# Altium PCB TG21_mach_nut_nhan _V1_ReV.PcbDoc (part 3 of 5)
Units mm, origin at the board's own origin, x right, y up, seen from the top; angles counter-clockwise.
Board outline 300 x 245 mm, 2 copper layers (Top Layer, Bottom Layer), stack 1.671 mm thick; 534 components, 407 nets, 1677 pads, 2608 vias.
Unrouted connection lines stored in the file: 3.
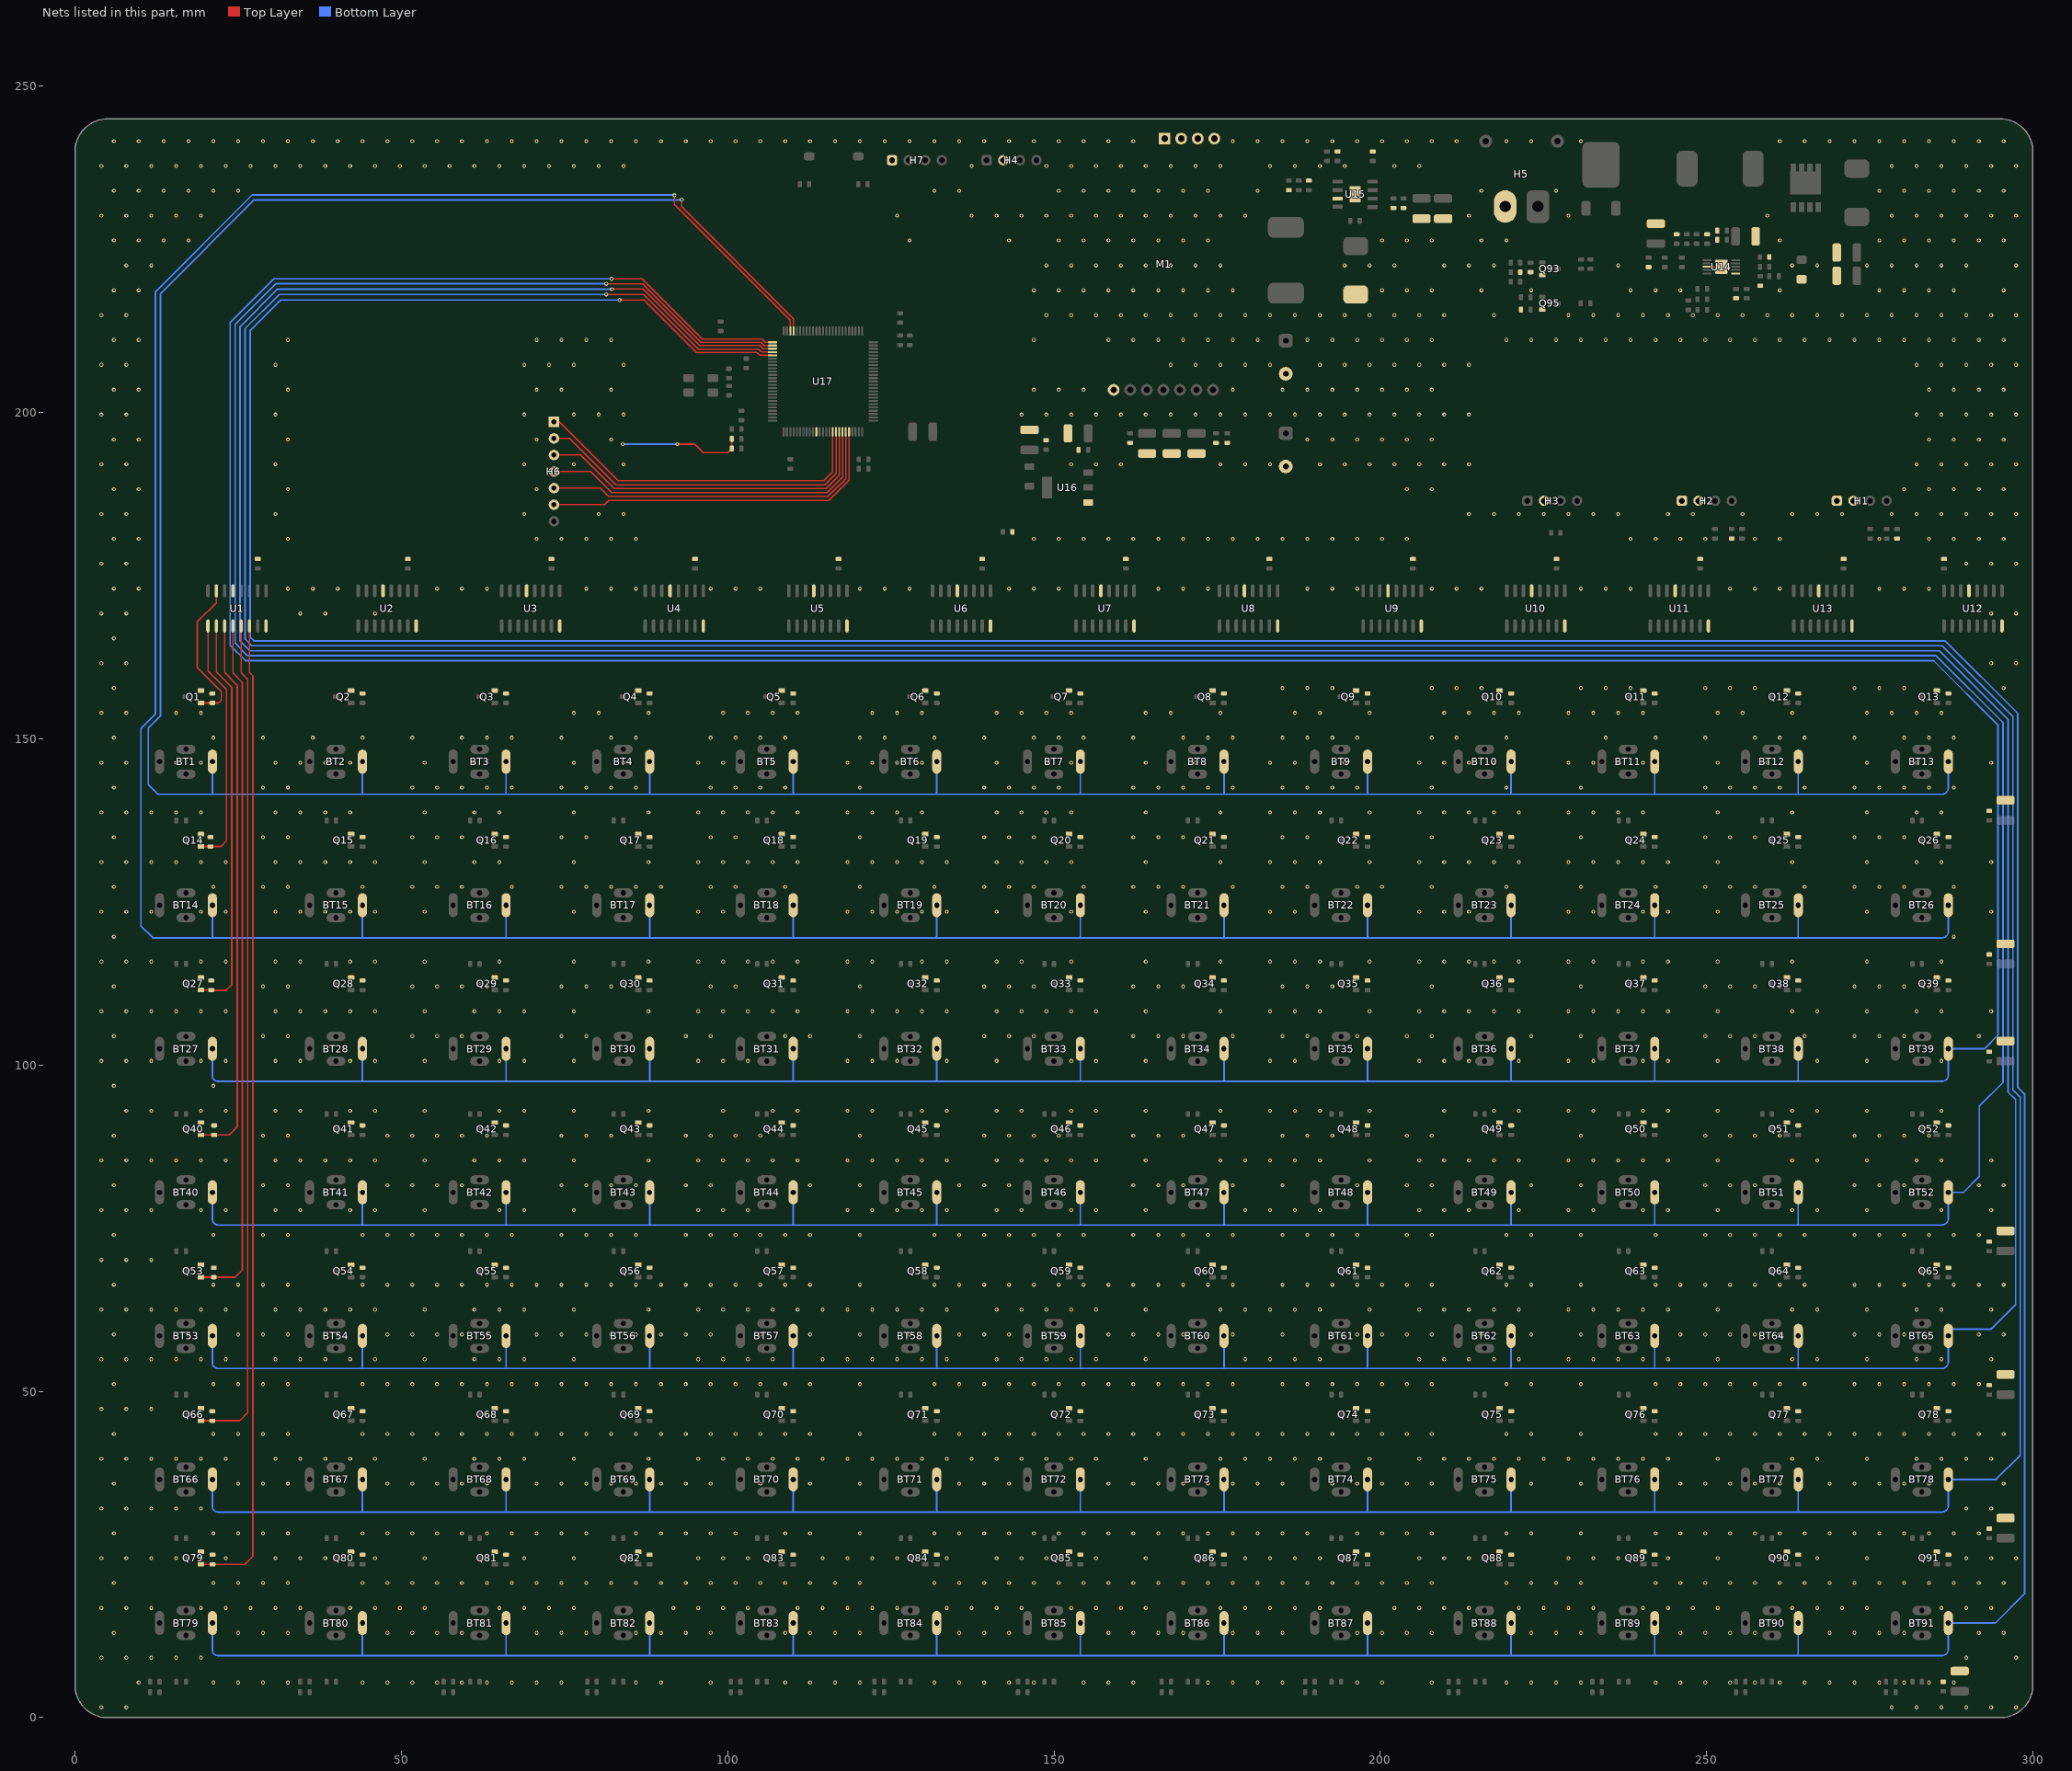
[diagram p3: the nets of this part, all layers, seen from the top]

## Via types
v1: diameter 0.6, hole 0.3, Top Layer to Bottom Layer, tented both sides, 2488 vias
v2: diameter 1.27, hole 0.711, Top Layer to Bottom Layer, tented both sides, 97 vias
v3: diameter 0.7, hole 0.3, Top Layer to Bottom Layer, tented both sides, 23 vias

## Nets (pads, with @x,y where several pads share a name; then routed paths per layer and width w, separated by ;. In a path a pad name is that pad's centre, name@x,y a point inside that pad or via, vN(x,y) a via of type N, cw(c..) or ccw(c..) an arc to the next point about the centre after c; other vN are vias at no path point) (continued)
GND: C1.1 C2.1 C3.1 C4.1 C5.1 C6.1 C7.1 C8.1 C9.1 C10.1 C11.1 C12.1 C13.1 C27.1 C28.1 C29.1 C30.1 C31.1 C32.1 C33.1 C34.1 C35.1 C36.1 C37.1 C38.1 C39.1 C40.1 C41.2 C42.2 C43.2 C44.1 C45.1 C48.1 C49.1 C50.2 C51.1 C52.1 C53.2 C54.1 C58.1 C59.1 C60.2 C62.1 C63.2 C64.2 C65.1 C66.1 C67.1 C68.2 C69.1 C70.1 C71.2 C72.1 C73.2 C74.1 C75.1 C76.2 C77.2 D2.1 H1.1 H1.2 H2.1 H2.2 H3.2 H4.2 H5.2 H7.1 M1.0 M1.7 Q1.2 Q2.2 Q3.2 Q4.2 Q5.2 Q6.2 Q7.2 Q8.2 Q9.2 Q10.2 Q11.2 Q12.2 Q13.2 Q14.2 Q15.2 Q16.2 Q17.2 Q18.2 Q19.2 Q20.2 Q21.2 Q22.2 Q23.2 Q24.2 Q25.2 Q26.2 Q27.2 Q28.2 Q29.2 Q30.2 Q31.2 Q32.2 Q33.2 Q34.2 Q35.2 Q36.2 Q37.2 Q38.2 Q39.2 Q40.2 Q41.2 Q42.2 Q43.2 Q44.2 Q45.2 Q46.2 Q47.2 Q48.2 Q49.2 Q50.2 Q51.2 Q52.2 Q53.2 Q54.2 Q55.2 Q56.2 Q57.2 Q58.2 Q59.2 Q60.2 Q61.2 Q62.2 Q63.2 Q64.2 Q65.2 Q66.2 Q67.2 Q68.2 Q69.2 Q70.2 Q71.2 Q72.2 Q73.2 Q74.2 Q75.2 Q76.2 Q77.2 Q78.2 Q79.2 Q80.2 Q81.2 Q82.2 Q83.2 Q84.2 Q85.2 Q86.2 Q87.2 Q88.2 Q89.2 Q90.2 Q91.2 Q93.2 Q95.2 R14.1 R15.1 R16.1 R17.1 R18.1 R19.1 R20.1 R21.1 R22.1 R23.1 R24.1 R25.1 R26.1 R40.1 R41.1 R42.1 R43.1 R44.1 R45.1 R46.1 R47.1 R48.1 R49.1 R50.1 R51.1 R52.1 R66.1 R67.1 R68.1 R69.1 R70.1 R71.1 R72.1 R73.1 R74.1 R75.1 R76.1 R77.1 R78.1 R92.1 R93.1 R94.1 R95.1 R96.1 R97.1 R98.1 R99.1 R100.1 R101.1 R102.1 R103.1 R104.1 R118.1 R119.1 R120.1 R121.1 R122.1 R123.1 R124.1 R125.1 R126.1 R127.1 R128.1 R129.1 R130.1 R144.1 R145.1 R146.1 R147.1 R148.1 R149.1 R150.1 R151.1 R152.1 R153.1 R154.1 R155.1 R156.1 R170.1 R171.1 R172.1 R173.1 R174.1 R175.1 R176.1 R177.1 R178.1 R179.1 R180.1 R181.1 R182.1 R205.1 R208.1 R211.1 R212.1 R213.2 R217.1 R218.1 R222.1 R225.1 RSNS1.1 U1.8 U1.13 U2.8 U2.13 U3.8 U3.13 U4.8 U4.13 U5.8 U5.13 U6.8 U6.13 U7.8 U7.13 U8.8 U8.13 U9.8 U9.13 U10.8 U10.13 U11.8 U11.13 U12.8 U12.13 U13.8 U13.13 U14.3 U14.6 U14.11 U15.0 U15.7 U16.1 | length 21.2
  Top Layer w0.178: U14.3@250.083,222.337 U14.11@252.267,222.337
  Top Layer w0.254: v1(92.304,195.174) 94.963,195.174 96.271,193.866 100.025,193.866 100.346,194.187 100.452,194.187 100.647,194.382 R213.2@100.647,194.488 C77.2@100.647,195.961
  Bottom Layer w0.254: v1(83.947,195.174) v1(92.304,195.174)
  other v1: 4.054,1.571 7.864,1.571 278.374,1.571 282.184,1.571 285.994,1.571 289.804,1.571 293.614,1.571 297.424,1.571 9.769,5.381 21.199,5.381 25.009,5.381 28.819,5.381 32.629,5.381 44.059,5.381 47.869,5.381 51.679,5.381 55.489,5.381 59.299,5.381 63.109,5.381 66.919,5.381 70.729,5.381 74.539,5.381 85.969,5.381 89.779,5.381 97.399,5.381 108.829,5.381 112.639,5.381 116.449,5.381 120.259,5.381 131.689,5.381 135.499,5.381 139.309,5.381 143.119,5.381 146.929,5.381 154.549,5.381 158.359,5.381 162.169,5.381 173.599,5.381 177.409,5.381 181.219,5.381 185.029,5.381 196.459,5.381 200.269,5.381 207.889,5.381 219.319,5.381 223.129,5.381 226.939,5.381 230.749,5.381 242.179,5.381 245.989,5.381 249.799,5.381 253.609,5.381 257.419,5.381 261.229,5.381 265.039,5.381 268.849,5.381 272.659,5.381 276.469,5.381 280.279,5.381 284.089,5.381 287.899,5.381 4.054,9.191 7.864,9.191 11.674,9.191 15.484,9.191 19.294,9.191 289.804,9.191 297.424,9.191 5.959,13.001 25.009,13.001 28.819,13.001 32.629,13.001 47.869,13.001 51.679,13.001 55.489,13.001 59.299,13.001 70.729,13.001 74.539,13.001 78.349,13.001 85.969,13.001 89.779,13.001 93.589,13.001 97.399,13.001 108.829,13.001 112.639,13.001 116.449,13.001 120.259,13.001 135.499,13.001 139.309,13.001 143.119,13.001 158.359,13.001 162.169,13.001 165.979,13.001 169.789,13.001 177.409,13.001 181.219,13.001 185.029,13.001 196.459,13.001 200.269,13.001 204.079,13.001 207.889,13.001 223.129,13.001 226.939,13.001 230.749,13.001 245.989,13.001 249.799,13.001 253.609,13.001 257.419,13.001 268.849,13.001 272.659,13.001 276.469,13.001 280.279,13.001 291.709,13.001 295.519,13.001 4.054,16.811 7.864,16.811 11.674,16.811 19.294,16.811 23.104,16.811 26.914,16.811 30.724,16.811 34.534,16.811 42.154,16.811 45.964,16.811 49.774,16.811 53.584,16.811 65.014,16.811 68.824,16.811 72.634,16.811 76.444,16.811 91.684,16.811 95.494,16.811 99.304,16.811 103.114,16.811 110.734,16.811 114.544,16.811 118.354,16.811 122.164,16.811 125.974,16.811 133.594,16.811 137.404,16.811 141.214,16.811 145.024,16.811 152.644,16.811 156.454,16.811 160.264,16.811 164.074,16.811 175.504,16.811 179.314,16.811 183.124,16.811 186.934,16.811 190.744,16.811 202.174,16.811 205.984,16.811 209.794,16.811 213.604,16.811 221.224,16.811 225.034,16.811 228.844,16.811 232.654,16.811 240.274,16.811 244.084,16.811 247.894,16.811 251.704,16.811 263.134,16.811 266.944,16.811 270.754,16.811 274.564,16.811 285.994,16.811 289.804,16.811 293.614,16.811 5.959,20.621 21.199,20.621 25.009,20.621 28.819,20.621 32.629,20.621 44.059,20.621 47.869,20.621 51.679,20.621 55.489,20.621 59.299,20.621 63.109,20.621 66.919,20.621 70.729,20.621 74.539,20.621 78.349,20.621 82.159,20.621 85.969,20.621 89.779,20.621 93.589,20.621 97.399,20.621 101.209,20.621 105.019,20.621 108.829,20.621 112.639,20.621 116.449,20.621 120.259,20.621 131.689,20.621 135.499,20.621 139.309,20.621 143.119,20.621 146.929,20.621 150.739,20.621 154.549,20.621 158.359,20.621 162.169,20.621 165.979,20.621 169.789,20.621 173.599,20.621 177.409,20.621 181.219,20.621 185.029,20.621 188.839,20.621 192.649,20.621 196.459,20.621 200.269,20.621 204.079,20.621 207.889,20.621 219.319,20.621 223.129,20.621 226.939,20.621 230.749,20.621 242.179,20.621 245.989,20.621 249.799,20.621 253.609,20.621 257.419,20.621 261.229,20.621 265.039,20.621 268.849,20.621 272.659,20.621 276.469,20.621 280.279,20.621 284.089,20.621 287.899,20.621 291.709,20.621 295.519,20.621 4.054,24.431 7.864,24.431 11.674,24.431 15.484,24.431 23.104,24.431 30.724,24.431 34.534,24.431 38.344,24.431 45.964,24.431 53.584,24.431 68.824,24.431 76.444,24.431 95.494,24.431 99.304,24.431 103.114,24.431 114.544,24.431 118.354,24.431 122.164,24.431 125.974,24.431 133.594,24.431 141.214,24.431 145.024,24.431 148.834,24.431 156.454,24.431 164.074,24.431 179.314,24.431 183.124,24.431 186.934,24.431 190.744,24.431 205.984,24.431 209.794,24.431 213.604,24.431 228.844,24.431 232.654,24.431 236.464,24.431 244.084,24.431 251.704,24.431 266.944,24.431 274.564,24.431 289.804,24.431 293.614,24.431 297.424,24.431 5.959,28.241 21.199,28.241 25.009,28.241 28.819,28.241 32.629,28.241 44.059,28.241 47.869,28.241 51.679,28.241 55.489,28.241 59.299,28.241 63.109,28.241 66.919,28.241 70.729,28.241 74.539,28.241 78.349,28.241 85.969,28.241 89.779,28.241 93.589,28.241 97.399,28.241 101.209,28.241 108.829,28.241 112.639,28.241 120.259,28.241 131.689,28.241 135.499,28.241 139.309,28.241 143.119,28.241 146.929,28.241 150.739,28.241 154.549,28.241 158.359,28.241 162.169,28.241 165.979,28.241 169.789,28.241 173.599,28.241 177.409,28.241 181.219,28.241 185.029,28.241 188.839,28.241 196.459,28.241 200.269,28.241 204.079,28.241 207.889,28.241 219.319,28.241 223.129,28.241 230.749,28.241 242.179,28.241 245.989,28.241 249.799,28.241 253.609,28.241 257.419,28.241 261.229,28.241 265.039,28.241 268.849,28.241 272.659,28.241 276.469,28.241 280.279,28.241 284.089,28.241 287.899,28.241 291.709,28.241 4.054,32.051 7.864,32.051 11.674,32.051 15.484,32.051 19.294,32.051 289.804,32.051 293.614,32.051 5.959,35.861 25.009,35.861 28.819,35.861 32.629,35.861 47.869,35.861 51.679,35.861 55.489,35.861 59.299,35.861 63.109,35.861 70.729,35.861 74.539,35.861 78.349,35.861 82.159,35.861 85.969,35.861 89.779,35.861 93.589,35.861 97.399,35.861 105.019,35.861 112.639,35.861 120.259,35.861 135.499,35.861 139.309,35.861 143.119,35.861 158.359,35.861 162.169,35.861 165.979,35.861 169.789,35.861 173.599,35.861 177.409,35.861 181.219,35.861 185.029,35.861 192.649,35.861 196.459,35.861 200.269,35.861 204.079,35.861 207.889,35.861 223.129,35.861 230.749,35.861 245.989,35.861 249.799,35.861 253.609,35.861 257.419,35.861 261.229,35.861 268.849,35.861 272.659,35.861 276.469,35.861 280.279,35.861 284.089,35.861 295.519,35.861 4.054,39.671 7.864,39.671 11.674,39.671 15.484,39.671 19.294,39.671 23.104,39.671 30.724,39.671 34.534,39.671 38.344,39.671 42.154,39.671 45.964,39.671 53.584,39.671 61.204,39.671 65.014,39.671 68.824,39.671 76.444,39.671 87.874,39.671 95.494,39.671 99.304,39.671 103.114,39.671 106.924,39.671 110.734,39.671 114.544,39.671 118.354,39.671 122.164,39.671 125.974,39.671 129.784,39.671 133.594,39.671 137.404,39.671 141.214,39.671 145.024,39.671 148.834,39.671 152.644,39.671 156.454,39.671 164.074,39.671 175.504,39.671 179.314,39.671 183.124,39.671 186.934,39.671 190.744,39.671 198.364,39.671 205.984,39.671 209.794,39.671 213.604,39.671 217.414,39.671 221.224,39.671 225.034,39.671 228.844,39.671 232.654,39.671 236.464,39.671 240.274,39.671 244.084,39.671 251.704,39.671 263.134,39.671 266.944,39.671 274.564,39.671 282.184,39.671 285.994,39.671 289.804,39.671 293.614,39.671 5.959,43.481 21.199,43.481 25.009,43.481 28.819,43.481 32.629,43.481 44.059,43.481 47.869,43.481 51.679,43.481 55.489,43.481 59.299,43.481 63.109,43.481 66.919,43.481 70.729,43.481 74.539,43.481 78.349,43.481 82.159,43.481 85.969,43.481 89.779,43.481 93.589,43.481 97.399,43.481 101.209,43.481 105.019,43.481 108.829,43.481 112.639,43.481 120.259,43.481 131.689,43.481 135.499,43.481 139.309,43.481 143.119,43.481 146.929,43.481 150.739,43.481 154.549,43.481 158.359,43.481 162.169,43.481 165.979,43.481 169.789,43.481 173.599,43.481 177.409,43.481 181.219,43.481 185.029,43.481 188.839,43.481 192.649,43.481 196.459,43.481 200.269,43.481 204.079,43.481 207.889,43.481 219.319,43.481 223.129,43.481 230.749,43.481 242.179,43.481 245.989,43.481 249.799,43.481 253.609,43.481 257.419,43.481 261.229,43.481 265.039,43.481 268.849,43.481 272.659,43.481 276.469,43.481 280.279,43.481 284.089,43.481 287.899,43.481 291.709,43.481 295.519,43.481 4.054,47.291 7.864,47.291 11.674,47.291 5.959,51.101 21.199,51.101 25.009,51.101 28.819,51.101 32.629,51.101 44.059,51.101 47.869,51.101 51.679,51.101 55.489,51.101 59.299,51.101 63.109,51.101 66.919,51.101 70.729,51.101 74.539,51.101 78.349,51.101 82.159,51.101 85.969,51.101 89.779,51.101 93.589,51.101 97.399,51.101 101.209,51.101 105.019,51.101 108.829,51.101 112.639,51.101 120.259,51.101 131.689,51.101 135.499,51.101 139.309,51.101 143.119,51.101 146.929,51.101 150.739,51.101 154.549,51.101 158.359,51.101 162.169,51.101 165.979,51.101 169.789,51.101 173.599,51.101 177.409,51.101 185.029,51.101 188.839,51.101 192.649,51.101 196.459,51.101 200.269,51.101 204.079,51.101 207.889,51.101 219.319,51.101 223.129,51.101 230.749,51.101 242.179,51.101 245.989,51.101 249.799,51.101 253.609,51.101 257.419,51.101 261.229,51.101 265.039,51.101 272.659,51.101 276.469,51.101 280.279,51.101 284.089,51.101 287.899,51.101 291.709,51.101 4.054,54.911 7.864,54.911 11.674,54.911 15.484,54.911 19.294,54.911 23.104,54.911 30.724,54.911 34.534,54.911 38.344,54.911 42.154,54.911 45.964,54.911 53.584,54.911 61.204,54.911 65.014,54.911 68.824,54.911 76.444,54.911 95.494,54.911 99.304,54.911 103.114,54.911 106.924,54.911 114.544,54.911 118.354,54.911 122.164,54.911 125.974,54.911 129.784,54.911 133.594,54.911 141.214,54.911 145.024,54.911 148.834,54.911 152.644,54.911 156.454,54.911 164.074,54.911 179.314,54.911 183.124,54.911 186.934,54.911 190.744,54.911 205.984,54.911 209.794,54.911 213.604,54.911 217.414,54.911 221.224,54.911 228.844,54.911 232.654,54.911 236.464,54.911 240.274,54.911 244.084,54.911 251.704,54.911 263.134,54.911 266.944,54.911 274.564,54.911 282.184,54.911 285.994,54.911 293.614,54.911 5.959,58.721 17.389,58.721 25.009,58.721 28.819,58.721 32.629,58.721 40.249,58.721 47.869,58.721 51.679,58.721 55.489,58.721 59.299,58.721 63.109,58.721 70.729,58.721 74.539,58.721 78.349,58.721 82.159,58.721 85.969,58.721 89.779,58.721 93.589,58.721 97.399,58.721 105.019,58.721 112.639,58.721 120.259,58.721 127.879,58.721 135.499,58.721 139.309,58.721 143.119,58.721 150.739,58.721 158.359,58.721 162.169,58.721 165.979,58.721 169.789,58.721 173.599,58.721 177.409,58.721 185.029,58.721 192.649,58.721 196.459,58.721 200.269,58.721 204.079,58.721 207.889,58.721 215.509,58.721 223.129,58.721 230.749,58.721 238.369,58.721 245.989,58.721 249.799,58.721 253.609,58.721 257.419,58.721 261.229,58.721 272.659,58.721 276.469,58.721 280.279,58.721 284.089,58.721 291.709,58.721 295.519,58.721 4.054,62.531 7.864,62.531 11.674,62.531 15.484,62.531 19.294,62.531 23.104,62.531 30.724,62.531 34.534,62.531 38.344,62.531 42.154,62.531 45.964,62.531 53.584,62.531 61.204,62.531 65.014,62.531 68.824,62.531 76.444,62.531 87.874,62.531 95.494,62.531 99.304,62.531 103.114,62.531 106.924,62.531 110.734,62.531 114.544,62.531 118.354,62.531 122.164,62.531 125.974,62.531 129.784,62.531 133.594,62.531 141.214,62.531 145.024,62.531 148.834,62.531 152.644,62.531 156.454,62.531 164.074,62.531 175.504,62.531 179.314,62.531 183.124,62.531 186.934,62.531 190.744,62.531 198.364,62.531 205.984,62.531 209.794,62.531 213.604,62.531 217.414,62.531 221.224,62.531 228.844,62.531 232.654,62.531 236.464,62.531 240.274,62.531 244.084,62.531 251.704,62.531 263.134,62.531 266.944,62.531 274.564,62.531 282.184,62.531 285.994,62.531 293.614,62.531 5.959,66.341 21.199,66.341 25.009,66.341 28.819,66.341 32.629,66.341 44.059,66.341 47.869,66.341 51.679,66.341 55.489,66.341 59.299,66.341 63.109,66.341 66.919,66.341 70.729,66.341 74.539,66.341 78.349,66.341 82.159,66.341 85.969,66.341 89.779,66.341 93.589,66.341 97.399,66.341 101.209,66.341 105.019,66.341 108.829,66.341 112.639,66.341 120.259,66.341 131.689,66.341 135.499,66.341 139.309,66.341 143.119,66.341 146.929,66.341 150.739,66.341 154.549,66.341 158.359,66.341 162.169,66.341 165.979,66.341 169.789,66.341 173.599,66.341 177.409,66.341 185.029,66.341 188.839,66.341 192.649,66.341 196.459,66.341 200.269,66.341 204.079,66.341 207.889,66.341 219.319,66.341 223.129,66.341 230.749,66.341 242.179,66.341 245.989,66.341 249.799,66.341 253.609,66.341 257.419,66.341 261.229,66.341 265.039,66.341 272.659,66.341 276.469,66.341 280.279,66.341 284.089,66.341 287.899,66.341 291.709,66.341 295.519,66.341 4.054,70.151 7.864,70.151 11.674,70.151 5.959,73.961 21.199,73.961 28.819,73.961 32.629,73.961 44.059,73.961 47.869,73.961 51.679,73.961 55.489,73.961 59.299,73.961 63.109,73.961 66.919,73.961 74.539,73.961 78.349,73.961 82.159,73.961 85.969,73.961 93.589,73.961 97.399,73.961 101.209,73.961 105.019,73.961 108.829,73.961 112.639,73.961 120.259,73.961 131.689,73.961 135.499,73.961 139.309,73.961 143.119,73.961 146.929,73.961 150.739,73.961 154.549,73.961 162.169,73.961 165.979,73.961 169.789,73.961 173.599,73.961 177.409,73.961 185.029,73.961 188.839,73.961 192.649,73.961 196.459,73.961 204.079,73.961 207.889,73.961 219.319,73.961 223.129,73.961 230.749,73.961 242.179,73.961 249.799,73.961 253.609,73.961 257.419,73.961 261.229,73.961 265.039,73.961 272.659,73.961 276.469,73.961 280.279,73.961 284.089,73.961 287.899,73.961 291.709,73.961 4.054,77.771 7.864,77.771 11.674,77.771 19.294,77.771 23.104,77.771 30.724,77.771 34.534,77.771 42.154,77.771 45.964,77.771 53.584,77.771 65.014,77.771 68.824,77.771 76.444,77.771 95.494,77.771 99.304,77.771 103.114,77.771 118.354,77.771 122.164,77.771 125.974,77.771 129.784,77.771 133.594,77.771 141.214,77.771 145.024,77.771 152.644,77.771 156.454,77.771 164.074,77.771 179.314,77.771 183.124,77.771 186.934,77.771 190.744,77.771 205.984,77.771 209.794,77.771 213.604,77.771 221.224,77.771 228.844,77.771 232.654,77.771 240.274,77.771 244.084,77.771 251.704,77.771 263.134,77.771 266.944,77.771 274.564,77.771 285.994,77.771 293.614,77.771 5.959,81.581 28.819,81.581 32.629,81.581 47.869,81.581 51.679,81.581 55.489,81.581 59.299,81.581 74.539,81.581 78.349,81.581 82.159,81.581 85.969,81.581 93.589,81.581 97.399,81.581 112.639,81.581 120.259,81.581 135.499,81.581 139.309,81.581 143.119,81.581 162.169,81.581 165.979,81.581 169.789,81.581 177.409,81.581 185.029,81.581 196.459,81.581 204.079,81.581 207.889,81.581 223.129,81.581 230.749,81.581 249.799,81.581 253.609,81.581 257.419,81.581 272.659,81.581 276.469,81.581 280.279,81.581 291.709,81.581 295.519,81.581 4.054,85.391 7.864,85.391 11.674,85.391 15.484,85.391 19.294,85.391 23.104,85.391 30.724,85.391 34.534,85.391 38.344,85.391 42.154,85.391 45.964,85.391 53.584,85.391 61.204,85.391 65.014,85.391 68.824,85.391 76.444,85.391 87.874,85.391 95.494,85.391 99.304,85.391 103.114,85.391 106.924,85.391 110.734,85.391 118.354,85.391 122.164,85.391 125.974,85.391 129.784,85.391 133.594,85.391 141.214,85.391 145.024,85.391 148.834,85.391 152.644,85.391 156.454,85.391 164.074,85.391 175.504,85.391 179.314,85.391 183.124,85.391 186.934,85.391 190.744,85.391 198.364,85.391 205.984,85.391 209.794,85.391 213.604,85.391 217.414,85.391 221.224,85.391 228.844,85.391 232.654,85.391 236.464,85.391 240.274,85.391 244.084,85.391 251.704,85.391 263.134,85.391 266.944,85.391 274.564,85.391 282.184,85.391 285.994,85.391 293.614,85.391 5.959,89.201 28.819,89.201 32.629,89.201 47.869,89.201 51.679,89.201 55.489,89.201 59.299,89.201 63.109,89.201 74.539,89.201 78.349,89.201 82.159,89.201 93.589,89.201 97.399,89.201 101.209,89.201 105.019,89.201 120.259,89.201 139.309,89.201 143.119,89.201 146.929,89.201 150.739,89.201 162.169,89.201 165.979,89.201 169.789,89.201 185.029,89.201 188.839,89.201 192.649,89.201 204.079,89.201 207.889,89.201 230.749,89.201 249.799,89.201 253.609,89.201 257.419,89.201 261.229,89.201 272.659,89.201 276.469,89.201 280.279,89.201 284.089,89.201 7.864,93.011 11.674,93.011 19.294,93.011 23.104,93.011 30.724,93.011 34.534,93.011 42.154,93.011 45.964,93.011 53.584,93.011 65.014,93.011 68.824,93.011 76.444,93.011 87.874,93.011 99.304,93.011 106.924,93.011 110.734,93.011 118.354,93.011 122.164,93.011 129.784,93.011 133.594,93.011 141.214,93.011 145.024,93.011 152.644,93.011 156.454,93.011 164.074,93.011 175.504,93.011 183.124,93.011 186.934,93.011 190.744,93.011 198.364,93.011 209.794,93.011 217.414,93.011 221.224,93.011 228.844,93.011 232.654,93.011 240.274,93.011 244.084,93.011 251.704,93.011 263.134,93.011 266.944,93.011 274.564,93.011 285.994,93.011 5.959,96.821 21.199,96.821 4.054,100.631 7.864,100.631 11.674,100.631 19.294,100.631 23.104,100.631 30.724,100.631 34.534,100.631 42.154,100.631 45.964,100.631 53.584,100.631 65.014,100.631 68.824,100.631 76.444,100.631 95.494,100.631 99.304,100.631 103.114,100.631 118.354,100.631 122.164,100.631 125.974,100.631 133.594,100.631 141.214,100.631 152.644,100.631 156.454,100.631 164.074,100.631 183.124,100.631 186.934,100.631 205.984,100.631 209.794,100.631 213.604,100.631 221.224,100.631 228.844,100.631 232.654,100.631 240.274,100.631 244.084,100.631 251.704,100.631 266.944,100.631 274.564,100.631 285.994,100.631 5.959,104.441 28.819,104.441 32.629,104.441 51.679,104.441 55.489,104.441 59.299,104.441 74.539,104.441 78.349,104.441 93.589,104.441 97.399,104.441 108.829,104.441 112.639,104.441 120.259,104.441 139.309,104.441 143.119,104.441 146.929,104.441 162.169,104.441 165.979,104.441 169.789,104.441 177.409,104.441 185.029,104.441 188.839,104.441 196.459,104.441 204.079,104.441 207.889,104.441 223.129,104.441 230.749,104.441 249.799,104.441 253.609,104.441 257.419,104.441 265.039,104.441 272.659,104.441 276.469,104.441 280.279,104.441 291.709,104.441 4.054,108.251 7.864,108.251 11.674,108.251 15.484,108.251 19.294,108.251 23.104,108.251 30.724,108.251 34.534,108.251 38.344,108.251 42.154,108.251 45.964,108.251 53.584,108.251 61.204,108.251 65.014,108.251 68.824,108.251 76.444,108.251 87.874,108.251 95.494,108.251 99.304,108.251 103.114,108.251 106.924,108.251 110.734,108.251 118.354,108.251 122.164,108.251 125.974,108.251 129.784,108.251 133.594,108.251 141.214,108.251 145.024,108.251 148.834,108.251 152.644,108.251 156.454,108.251 164.074,108.251 175.504,108.251 183.124,108.251 186.934,108.251 190.744,108.251 198.364,108.251 205.984,108.251 209.794,108.251 213.604,108.251 217.414,108.251 221.224,108.251 228.844,108.251 232.654,108.251 236.464,108.251 240.274,108.251 244.084,108.251 251.704,108.251 263.134,108.251 266.944,108.251 274.564,108.251 282.184,108.251 285.994,108.251 293.614,108.251 5.959,112.061 28.819,112.061 32.629,112.061 51.679,112.061 55.489,112.061 59.299,112.061 63.109,112.061 74.539,112.061 78.349,112.061 82.159,112.061 97.399,112.061 101.209,112.061 120.259,112.061 139.309,112.061 143.119,112.061 146.929,112.061 162.169,112.061 165.979,112.061 169.789,112.061 185.029,112.061 188.839,112.061 192.649,112.061 207.889,112.061 230.749,112.061 249.799,112.061 253.609,112.061 257.419,112.061 261.229,112.061 272.659,112.061 276.469,112.061 280.279,112.061 284.089,112.061 4.054,115.871 7.864,115.871 11.674,115.871 19.294,115.871 23.104,115.871 30.724,115.871 34.534,115.871 42.154,115.871 45.964,115.871 53.584,115.871 65.014,115.871 76.444,115.871 87.874,115.871 95.494,115.871 99.304,115.871 103.114,115.871 106.924,115.871 110.734,115.871 118.354,115.871 122.164,115.871 129.784,115.871 133.594,115.871 141.214,115.871 145.024,115.871 152.644,115.871 164.074,115.871 175.504,115.871 183.124,115.871 186.934,115.871 190.744,115.871 198.364,115.871 205.984,115.871 209.794,115.871 213.604,115.871 217.414,115.871 221.224,115.871 228.844,115.871 232.654,115.871 240.274,115.871 244.084,115.871 251.704,115.871 263.134,115.871 274.564,115.871 285.994,115.871 5.959,119.681 287.899,119.681 4.054,123.491 7.864,123.491 11.674,123.491 19.294,123.491 23.104,123.491 30.724,123.491 34.534,123.491 38.344,123.491 42.154,123.491 45.964,123.491 53.584,123.491 76.444,123.491 95.494,123.491 99.304,123.491 118.354,123.491 122.164,123.491 125.974,123.491 129.784,123.491 133.594,123.491 141.214,123.491 152.644,123.491 164.074,123.491 183.124,123.491 186.934,123.491 205.984,123.491 209.794,123.491 213.604,123.491 228.844,123.491 232.654,123.491 240.274,123.491 244.084,123.491 251.704,123.491 274.564,123.491 293.614,123.491 5.959,127.301 21.199,127.301 28.819,127.301 32.629,127.301 44.059,127.301 51.679,127.301 55.489,127.301 59.299,127.301 66.919,127.301 74.539,127.301 78.349,127.301 82.159,127.301 85.969,127.301 89.779,127.301 97.399,127.301 101.209,127.301 108.829,127.301 120.259,127.301 131.689,127.301 139.309,127.301 143.119,127.301 146.929,127.301 154.549,127.301 162.169,127.301 165.979,127.301 169.789,127.301 177.409,127.301 185.029,127.301 188.839,127.301 196.459,127.301 200.269,127.301 207.889,127.301 219.319,127.301 230.749,127.301 242.179,127.301 249.799,127.301 253.609,127.301 257.419,127.301 265.039,127.301 272.659,127.301 276.469,127.301 280.279,127.301 287.899,127.301 4.054,131.111 7.864,131.111 11.674,131.111 15.484,131.111 19.294,131.111 23.104,131.111 30.724,131.111 34.534,131.111 38.344,131.111 42.154,131.111 45.964,131.111 53.584,131.111 61.204,131.111 65.014,131.111 76.444,131.111 87.874,131.111 95.494,131.111 99.304,131.111 103.114,131.111 106.924,131.111 110.734,131.111 118.354,131.111 122.164,131.111 125.974,131.111 129.784,131.111 133.594,131.111 141.214,131.111 145.024,131.111 148.834,131.111 152.644,131.111 164.074,131.111 175.504,131.111 183.124,131.111 186.934,131.111 190.744,131.111 198.364,131.111 205.984,131.111 209.794,131.111 213.604,131.111 217.414,131.111 221.224,131.111 228.844,131.111 232.654,131.111 236.464,131.111 240.274,131.111 244.084,131.111 251.704,131.111 263.134,131.111 274.564,131.111 282.184,131.111 285.994,131.111 293.614,131.111 5.959,134.921 28.819,134.921 32.629,134.921 51.679,134.921 55.489,134.921 59.299,134.921 74.539,134.921 78.349,134.921 97.399,134.921 101.209,134.921 120.259,134.921 139.309,134.921 143.119,134.921 146.929,134.921 162.169,134.921 165.979,134.921 169.789,134.921 185.029,134.921 188.839,134.921 207.889,134.921 230.749,134.921 249.799,134.921 253.609,134.921 257.419,134.921 272.659,134.921 276.469,134.921 280.279,134.921 4.054,138.731 7.864,138.731 11.674,138.731 15.484,138.731 19.294,138.731 30.724,138.731 34.534,138.731 38.344,138.731 42.154,138.731 53.584,138.731 61.204,138.731 65.014,138.731 76.444,138.731 87.874,138.731 95.494,138.731 99.304,138.731 103.114,138.731 106.924,138.731 110.734,138.731 118.354,138.731 122.164,138.731 125.974,138.731 129.784,138.731 141.214,138.731 145.024,138.731 148.834,138.731 152.644,138.731 164.074,138.731 175.504,138.731 183.124,138.731 186.934,138.731 190.744,138.731 198.364,138.731 205.984,138.731 209.794,138.731 213.604,138.731 217.414,138.731 221.224,138.731 228.844,138.731 232.654,138.731 236.464,138.731 240.274,138.731 251.704,138.731 263.134,138.731 274.564,138.731 282.184,138.731 285.994,138.731 5.959,142.541 28.819,142.541 32.629,142.541 51.679,142.541 55.489,142.541 59.299,142.541 63.109,142.541 66.919,142.541 74.539,142.541 78.349,142.541 82.159,142.541 85.969,142.541 97.399,142.541 101.209,142.541 105.019,142.541 108.829,142.541 120.259,142.541 139.309,142.541 143.119,142.541 146.929,142.541 150.739,142.541 162.169,142.541 165.979,142.541 169.789,142.541 173.599,142.541 177.409,142.541 185.029,142.541 188.839,142.541 192.649,142.541 196.459,142.541 207.889,142.541 219.319,142.541 230.749,142.541 249.799,142.541 253.609,142.541 257.419,142.541 261.229,142.541 265.039,142.541 272.659,142.541 276.469,142.541 280.279,142.541 284.089,142.541 287.899,142.541 4.054,146.351 7.864,146.351 15.484,146.351 19.294,146.351 30.724,146.351 34.534,146.351 38.344,146.351 42.154,146.351 53.584,146.351 61.204,146.351 76.444,146.351 84.064,146.351 95.494,146.351 99.304,146.351 106.924,146.351 118.354,146.351 122.164,146.351 125.974,146.351 129.784,146.351 141.214,146.351 148.834,146.351 152.644,146.351 164.074,146.351 171.694,146.351 183.124,146.351 186.934,146.351 194.554,146.351 205.984,146.351 209.794,146.351 213.604,146.351 217.414,146.351 228.844,146.351 232.654,146.351 236.464,146.351 240.274,146.351 251.704,146.351 259.324,146.351 274.564,146.351 282.184,146.351 293.614,146.351 5.959,150.161 21.199,150.161 28.819,150.161 36.439,150.161 44.059,150.161 51.679,150.161 59.299,150.161 63.109,150.161 66.919,150.161 74.539,150.161 82.159,150.161 85.969,150.161 97.399,150.161 101.209,150.161 105.019,150.161 108.829,150.161 120.259,150.161 124.069,150.161 131.689,150.161 139.309,150.161 146.929,150.161 150.739,150.161 154.549,150.161 162.169,150.161 169.789,150.161 173.599,150.161 177.409,150.161 185.029,150.161 188.839,150.161 192.649,150.161 196.459,150.161 207.889,150.161 211.699,150.161 219.319,150.161 234.559,150.161 242.179,150.161 249.799,150.161 257.419,150.161 261.229,150.161 265.039,150.161 272.659,150.161 280.279,150.161 284.089,150.161 287.899,150.161 4.054,153.971 7.864,153.971 15.484,153.971 19.294,153.971 76.444,153.971 80.254,153.971 87.874,153.971 99.304,153.971 103.114,153.971 106.924,153.971 110.734,153.971 122.164,153.971 125.974,153.971 129.784,153.971 141.214,153.971 145.024,153.971 148.834,153.971 152.644,153.971 164.074,153.971 167.884,153.971 175.504,153.971 186.934,153.971 190.744,153.971 198.364,153.971 209.794,153.971 213.604,153.971 217.414,153.971 221.224,153.971 228.844,153.971 232.654,153.971 236.464,153.971 240.274,153.971 251.704,153.971 255.514,153.971 263.134,153.971 274.564,153.971 278.374,153.971 282.184,153.971 285.994,153.971 5.959,157.781 185.029,157.781 188.839,157.781 192.649,157.781 207.889,157.781 211.699,157.781 215.509,157.781 230.749,157.781 234.559,157.781 238.369,157.781 249.799,157.781 253.609,157.781 257.419,157.781 272.659,157.781 276.469,157.781 280.279,157.781 295.519,157.781 4.054,161.591 7.864,161.591 293.614,161.591 297.424,161.591 5.959,165.401 4.054,169.211 7.864,169.211 34.534,169.211 38.344,169.211 45.964,169.211 293.614,169.211 297.424,169.211 5.959,173.021 9.769,173.021 32.629,173.021 36.439,173.021 40.249,173.021 55.489,173.021 59.299,173.021 63.109,173.021 78.349,173.021 82.159,173.021 85.969,173.021 97.399,173.021 101.209,173.021 105.019,173.021 120.259,173.021 124.069,173.021 127.879,173.021 143.119,173.021 146.929,173.021 150.739,173.021 165.979,173.021 169.789,173.021 173.599,173.021 188.839,173.021 192.649,173.021 196.459,173.021 207.889,173.021 211.699,173.021 215.509,173.021 230.749,173.021 234.559,173.021 238.369,173.021 253.609,173.021 257.419,173.021 261.229,173.021 276.469,173.021 280.279,173.021 284.089,173.021 4.054,176.831 7.864,176.831 289.804,176.831 293.614,176.831 297.424,176.831 5.959,180.641 9.769,180.641 32.629,180.641 70.729,180.641 74.539,180.641 78.349,180.641 82.159,180.641 85.969,180.641 146.929,180.641 150.739,180.641 154.549,180.641 158.359,180.641 162.169,180.641 165.979,180.641 169.789,180.641 173.599,180.641 177.409,180.641 181.219,180.641 185.029,180.641 188.839,180.641 192.649,180.641 196.459,180.641 200.269,180.641 204.079,180.641 238.369,180.641 242.179,180.641 245.989,180.641 249.799,180.641 257.419,180.641 261.229,180.641 276.469,180.641 284.089,180.641 287.899,180.641 291.709,180.641 295.519,180.641 4.054,184.451 7.864,184.451 30.724,184.451 68.824,184.451 80.254,184.451 84.064,184.451 213.604,184.451 217.414,184.451 221.224,184.451 225.034,184.451 228.844,184.451 232.654,184.451 236.464,184.451 244.084,184.451 247.894,184.451 255.514,184.451 263.134,184.451 266.944,184.451 270.754,184.451 278.374,184.451 282.184,184.451 285.994,184.451 289.804,184.451 293.614,184.451 297.424,184.451 5.959,188.261 9.769,188.261 32.629,188.261 70.729,188.261 204.079,188.261 207.889,188.261 280.279,188.261 284.089,188.261 287.899,188.261 291.709,188.261 295.519,188.261 4.054,192.071 7.864,192.071 30.724,192.071 68.824,192.071 76.444,192.071 84.064,192.071 152.644,192.071 156.454,192.071 160.264,192.071 175.504,192.071 179.314,192.071 183.124,192.071 190.744,192.071 194.554,192.071 198.364,192.071 202.174,192.071 205.984,192.071 209.794,192.071 213.604,192.071 282.184,192.071 285.994,192.071 289.804,192.071 293.614,192.071 297.424,192.071 5.959,195.881 9.769,195.881 32.629,195.881 70.729,195.881 82.159,195.881 188.839,195.881 192.649,195.881 196.459,195.881 200.269,195.881 204.079,195.881 207.889,195.881 284.089,195.881 287.899,195.881 291.709,195.881 295.519,195.881 4.054,199.691 7.864,199.691 30.724,199.691 68.824,199.691 76.444,199.691 80.254,199.691 84.064,199.691 145.024,199.691 148.834,199.691 152.644,199.691 156.454,199.691 160.264,199.691 164.074,199.691 167.884,199.691 171.694,199.691 175.504,199.691 179.314,199.691 183.124,199.691 186.934,199.691 190.744,199.691 194.554,199.691 198.364,199.691 202.174,199.691 205.984,199.691 209.794,199.691 213.604,199.691 282.184,199.691 285.994,199.691 289.804,199.691 293.614,199.691 297.424,199.691 5.959,203.501 9.769,203.501 32.629,203.501 70.729,203.501 74.539,203.501 82.159,203.501 146.929,203.501 150.739,203.501 154.549,203.501 177.409,203.501 185.029,203.501 188.839,203.501 192.649,203.501 196.459,203.501 200.269,203.501 204.079,203.501 207.889,203.501 284.089,203.501 287.899,203.501 291.709,203.501 295.519,203.501 4.054,207.311 7.864,207.311 30.724,207.311 68.824,207.311 72.634,207.311 76.444,207.311 84.064,207.311 167.884,207.311 171.694,207.311 175.504,207.311 179.314,207.311 183.124,207.311 190.744,207.311 194.554,207.311 198.364,207.311 202.174,207.311 205.984,207.311 209.794,207.311 213.604,207.311 282.184,207.311 285.994,207.311 289.804,207.311 293.614,207.311 297.424,207.311 5.959,211.121 9.769,211.121 32.629,211.121 70.729,211.121 74.539,211.121 78.349,211.121 82.159,211.121 146.929,211.121 158.359,211.121 162.169,211.121 165.979,211.121 169.789,211.121 173.599,211.121 177.409,211.121 181.219,211.121 188.839,211.121 192.649,211.121 196.459,211.121 200.269,211.121 204.079,211.121 207.889,211.121 219.319,211.121 223.129,211.121 226.939,211.121 230.749,211.121 234.559,211.121 238.369,211.121 242.179,211.121 245.989,211.121 249.799,211.121 253.609,211.121 257.419,211.121 261.229,211.121 265.039,211.121 268.849,211.121 272.659,211.121 276.469,211.121 280.279,211.121 284.089,211.121 287.899,211.121 291.709,211.121 295.519,211.121 4.054,214.931 7.864,214.931 148.834,214.931 152.644,214.931 156.454,214.931 160.264,214.931 164.074,214.931 167.884,214.931 171.694,214.931 175.504,214.931 179.314,214.931 183.124,214.931 186.934,214.931 190.744,214.931 194.554,214.931 198.364,214.931 202.174,214.931 205.984,214.931 209.794,214.931 217.414,214.931 228.844,214.931 232.654,214.931 236.464,214.931 240.274,214.931 244.084,214.931 247.894,214.931 251.704,214.931 255.514,214.931 259.324,214.931 263.134,214.931 266.944,214.931 270.754,214.931 274.564,214.931 278.374,214.931 282.184,214.931 285.994,214.931 289.804,214.931 293.614,214.931 297.424,214.931 5.959,218.741 9.769,218.741 146.929,218.741 150.739,218.741 154.549,218.741 158.359,218.741 162.169,218.741 165.979,218.741 169.789,218.741 173.599,218.741 177.409,218.741 200.269,218.741 204.079,218.741 207.889,218.741 215.509,218.741 223.129,218.741 238.369,218.741 242.179,218.741 245.989,218.741 261.229,218.741 276.469,218.741 280.279,218.741 284.089,218.741 287.899,218.741 295.519,218.741 7.864,222.551 11.674,222.551 148.834,222.551 152.644,222.551 156.454,222.551 160.264,222.551 164.074,222.551 167.884,222.551 171.694,222.551 175.504,222.551 194.554,222.551 198.364,222.551 202.174,222.551 209.794,222.551 213.604,222.551 217.414,222.551 236.464,222.551 263.134,222.551 266.944,222.551 274.564,222.551 278.374,222.551 282.184,222.551 285.994,222.551 289.804,222.551 297.424,222.551 5.959,226.361 9.769,226.361 13.579,226.361 17.389,226.361 127.879,226.361 143.119,226.361 150.739,226.361 154.549,226.361 158.359,226.361 162.169,226.361 165.979,226.361 169.789,226.361 173.599,226.361 200.269,226.361 204.079,226.361 207.889,226.361 215.509,226.361 219.319,226.361 261.229,226.361 276.469,226.361 280.279,226.361 284.089,226.361 287.899,226.361 291.709,226.361 295.519,226.361 4.054,230.171 7.864,230.171 11.674,230.171 15.484,230.171 19.294,230.171 125.974,230.171 137.404,230.171 141.214,230.171 145.024,230.171 148.834,230.171 152.644,230.171 156.454,230.171 160.264,230.171 164.074,230.171 167.884,230.171 171.694,230.171 175.504,230.171 179.314,230.171 213.604,230.171 228.844,230.171 259.324,230.171 278.374,230.171 282.184,230.171 285.994,230.171 289.804,230.171 293.614,230.171 297.424,230.171 5.959,233.981 9.769,233.981 13.579,233.981 17.389,233.981 21.199,233.981 25.009,233.981 131.689,233.981 135.499,233.981 150.739,233.981 154.549,233.981 158.359,233.981 162.169,233.981 165.979,233.981 169.789,233.981 173.599,233.981 181.219,233.981 215.509,233.981 226.939,233.981 276.469,233.981 280.279,233.981 284.089,233.981 287.899,233.981 291.709,233.981 295.519,233.981 4.054,237.791 7.864,237.791 11.674,237.791 15.484,237.791 19.294,237.791 23.104,237.791 26.914,237.791 30.724,237.791 34.534,237.791 38.344,237.791 42.154,237.791 45.964,237.791 49.774,237.791 53.584,237.791 57.394,237.791 61.204,237.791 65.014,237.791 68.824,237.791 72.634,237.791 76.444,237.791 80.254,237.791 84.064,237.791 137.404,237.791 148.834,237.791 152.644,237.791 156.454,237.791 160.264,237.791 164.074,237.791 167.884,237.791 171.694,237.791 175.504,237.791 183.124,237.791 186.934,237.791 190.744,237.791 194.554,237.791 202.174,237.791 205.984,237.791 278.374,237.791 282.184,237.791 285.994,237.791 289.804,237.791 293.614,237.791 297.424,237.791 5.959,241.601 9.769,241.601 13.579,241.601 17.389,241.601 21.199,241.601 25.009,241.601 28.819,241.601 32.629,241.601 36.439,241.601 40.249,241.601 44.059,241.601 47.869,241.601 51.679,241.601 55.489,241.601 59.299,241.601 63.109,241.601 66.919,241.601 70.729,241.601 74.539,241.601 78.349,241.601 82.159,241.601 85.969,241.601 89.779,241.601 93.589,241.601 97.399,241.601 101.209,241.601 105.019,241.601 108.829,241.601 112.639,241.601 116.449,241.601 120.259,241.601 124.069,241.601 127.879,241.601 131.689,241.601 135.499,241.601 139.309,241.601 143.119,241.601 146.929,241.601 150.739,241.601 154.549,241.601 158.359,241.601 162.169,241.601 177.409,241.601 181.219,241.601 185.029,241.601 188.839,241.601 192.649,241.601 196.459,241.601 200.269,241.601 204.079,241.601 207.889,241.601 211.699,241.601 219.319,241.601 223.129,241.601 230.749,241.601 261.229,241.601 265.039,241.601 268.849,241.601 272.659,241.601 276.469,241.601 280.279,241.601 284.089,241.601 287.899,241.601 291.709,241.601 295.519,241.601
H: U17.36
H1: BT1.2 BT2.2 BT3.2 BT4.2 BT5.2 BT6.2 BT7.2 BT8.2 BT9.2 BT10.2 BT11.2 BT12.2 BT13.2 U17.97 | length 530.1
  Top Layer w0.178: v1(92.964,232.639) 92.964,231.521 110.105,214.38 U17.97@110.105,212.5
  Bottom Layer w0.254: BT1.2@21.05,146.5 21.05,141.503 21.053,141.5 ; BT2.2@44.05,146.5 44.05,141.5 ; BT3.2@66.05,146.5 66.05,141.5 ; BT4.2@88.05,146.5 88.05,141.5 ; v1(92.964,232.639) 92.913,232.588 27.463,232.588 13.106,218.231 13.106,153.532 11.227,151.653 11.227,143.002 12.729,141.5 21.053,141.5 ; BT5.2@110.05,146.5 110.05,141.5 ; BT6.2@132.05,146.5 132.05,141.5 ; BT7.2@154.05,146.5 154.05,141.5 ; BT8.2@176.05,146.5 176.05,141.5 ; BT9.2@198.05,146.5 198.05,141.5 ; BT10.2@220.05,146.5 220.05,141.5 ; BT11.2@242.05,146.5 242.05,141.5 ; BT12.2@264.05,146.5 264.05,141.5 ; BT13.2@287.05,146.5 287.05,142.515 cw(c286.035,142.515) 286.035,141.5 264.05,141.5 ; 21.053,141.5 22.25,141.5 44.05,141.5 ; 44.05,141.5 66.05,141.5 ; 66.05,141.5 88.05,141.5 ; 88.05,141.5 110.05,141.5 ; 110.05,141.5 132.05,141.5 ; 132.05,141.5 154.05,141.5 ; 154.05,141.5 176.05,141.5 ; 176.05,141.5 198.05,141.5 ; 198.05,141.5 220.05,141.5 ; 220.05,141.5 242.05,141.5 ; 242.05,141.5 264.05,141.5
H2: BT14.2 BT15.2 BT16.2 BT17.2 BT18.2 BT19.2 BT20.2 BT21.2 BT22.2 BT23.2 BT24.2 BT25.2 BT26.2 U17.98 | length 554.2
  Top Layer w0.178: v1(91.846,233.299) 91.846,231.877 109.605,214.118 U17.98@109.605,212.5
  Bottom Layer w0.254: 21.05,120.387 21.05,119.502 21.052,119.5 ; 21.05,120.388 BT14.2@21.05,124.5 ; BT15.2@44.05,124.5 44.05,119.5 ; BT16.2@66.05,124.5 66.05,119.5 ; BT17.2@88.05,124.5 88.05,119.5 ; v1(91.846,233.299) 91.796,233.35 27.147,233.35 12.344,218.547 12.344,153.848 10.109,151.613 10.109,121.31 11.92,119.5 21.052,119.5 ; BT18.2@110.05,124.5 110.05,119.5 ; BT19.2@132.05,124.5 132.05,119.5 ; BT20.2@154.05,124.5 154.05,119.5 ; BT21.2@176.05,124.5 176.05,119.5 ; BT22.2@198.05,124.5 198.05,119.5 ; BT23.2@220.05,124.5 220.05,119.5 ; BT24.2@242.05,124.5 242.05,119.5 ; BT25.2@264.05,124.5 264.05,119.5 ; BT26.2@287.05,124.5 287.05,120.515 cw(c286.035,120.515) 286.035,119.5 264.05,119.5 ; 21.052,119.5 22.25,119.5 44.05,119.5 ; 44.05,119.5 66.05,119.5 ; 66.05,119.5 88.05,119.5 ; 88.05,119.5 110.05,119.5 ; 110.05,119.5 132.05,119.5 ; 132.05,119.5 154.05,119.5 ; 154.05,119.5 176.05,119.5 ; 176.05,119.5 198.05,119.5 ; 198.05,119.5 220.05,119.5 ; 220.05,119.5 242.05,119.5 ; 242.05,119.5 264.05,119.5
H3: BT27.2 BT28.2 BT29.2 BT30.2 BT31.2 BT32.2 BT33.2 BT34.2 BT35.2 BT36.2 BT37.2 BT38.2 BT39.2 U17.1 | length 801.5
  Top Layer w0.178: v1(82.22,220.497) 86.919,220.497 96.139,211.277 105.283,211.277 105.785,210.775 U17.1@106.88,210.775
  Bottom Layer w0.254: 21.05,98.387 ccw(c21.937,98.387) 21.937,97.5 44.05,97.5 ; 21.05,98.388 BT27.2@21.05,102.5 ; BT28.2@44.05,102.5 44.05,97.5 ; BT29.2@66.05,102.5 66.05,97.5 ; v1(82.22,220.497) 30.459,220.497 23.774,213.813 23.774,164.351 26.149,161.976 284.785,161.976 294.665,152.095 294.665,104.623 292.543,102.5 BT39.2@287.05,102.5 287.05,98.515 cw(c286.035,98.515) 286.035,97.5 264.05,97.5 ; BT30.2@88.05,102.5 88.05,97.5 ; BT31.2@110.05,102.5 110.05,97.5 ; BT32.2@132.05,102.5 132.05,97.5 ; BT33.2@154.05,102.5 154.05,97.5 ; BT34.2@176.05,102.5 176.05,97.5 ; BT35.2@198.05,102.5 198.05,97.5 ; BT36.2@220.05,102.5 220.05,97.5 ; BT37.2@242.05,102.5 242.05,97.5 ; BT38.2@264.05,102.5 264.05,97.5 ; 44.05,97.5 66.05,97.5 ; 66.05,97.5 88.05,97.5 ; 88.05,97.5 110.05,97.5 ; 110.05,97.5 132.05,97.5 ; 132.05,97.5 154.05,97.5 ; 154.05,97.5 176.05,97.5 ; 176.05,97.5 198.05,97.5 ; 198.05,97.5 220.05,97.5 ; 220.05,97.5 242.05,97.5 ; 242.05,97.5 264.05,97.5
H4: BT40.2 BT41.2 BT42.2 BT43.2 BT44.2 BT45.2 BT46.2 BT47.2 BT48.2 BT49.2 BT50.2 BT51.2 BT52.2 U17.2 | length 820.6
  Top Layer w0.178: v1(81.407,219.735) 86.96,219.735 95.926,210.769 105.105,210.769 105.593,210.282 106.873,210.282 U17.2@106.88,210.275
  Bottom Layer w0.254: 21.05,76.387 ccw(c21.937,76.387) 21.937,75.5 44.05,75.5 ; 21.05,76.388 BT40.2@21.05,80.5 ; BT41.2@44.05,80.5 44.05,75.5 ; BT42.2@66.05,80.5 66.05,75.5 ; v1(81.407,219.735) 30.775,219.735 24.536,213.497 24.536,164.666 26.465,162.738 285.177,162.738 295.427,152.487 295.427,97.358 291.795,93.726 291.795,82.931 289.364,80.5 BT52.2@287.05,80.5 287.05,76.515 cw(c286.035,76.515) 286.035,75.5 264.05,75.5 ; BT43.2@88.05,80.5 88.05,75.5 ; BT44.2@110.05,80.5 110.05,75.5 ; BT45.2@132.05,80.5 132.05,75.5 ; BT46.2@154.05,80.5 154.05,75.5 ; BT47.2@176.05,80.5 176.05,75.5 ; BT48.2@198.05,80.5 198.05,75.5 ; BT49.2@220.05,80.5 220.05,75.5 ; BT50.2@242.05,80.5 242.05,75.5 ; BT51.2@264.05,80.5 264.05,75.5 ; 44.05,75.5 66.05,75.5 ; 66.05,75.5 88.05,75.5 ; 88.05,75.5 110.05,75.5 ; 110.05,75.5 132.05,75.5 ; 132.05,75.5 154.05,75.5 ; 154.05,75.5 176.05,75.5 ; 176.05,75.5 198.05,75.5 ; 198.05,75.5 220.05,75.5 ; 220.05,75.5 242.05,75.5 ; 242.05,75.5 264.05,75.5
H5: BT53.2 BT54.2 BT55.2 BT56.2 BT57.2 BT58.2 BT59.2 BT60.2 BT61.2 BT62.2 BT63.2 BT64.2 BT65.2 U17.3 | length 844.7
  Top Layer w0.178: v1(82.271,218.923) 87.046,218.923 95.707,210.261 104.927,210.261 105.414,209.775 U17.3@106.88,209.775
  Bottom Layer w0.254: 21.05,54.387 ccw(c21.937,54.387) 21.937,53.5 44.05,53.5 ; 21.05,54.388 BT53.2@21.05,58.5 ; BT54.2@44.05,58.5 44.05,53.5 ; BT55.2@66.05,58.5 66.05,53.5 ; v1(82.271,218.923) 31.04,218.923 25.298,213.181 25.298,164.982 26.781,163.5 285.662,163.5 296.189,152.972 296.189,95.885 297.359,94.715 297.359,63.323 293.559,59.523 287.579,59.523 287.05,58.994 BT65.2@287.05,58.5 287.05,54.515 cw(c286.035,54.515) 286.035,53.5 264.05,53.5 ; BT56.2@88.05,58.5 88.05,53.5 ; BT57.2@110.05,58.5 110.05,53.5 ; BT58.2@132.05,58.5 132.05,53.5 ; BT59.2@154.05,58.5 154.05,53.5 ; BT60.2@176.05,58.5 176.05,53.5 ; BT61.2@198.05,58.5 198.05,53.5 ; BT62.2@220.05,58.5 220.05,53.5 ; BT63.2@242.05,58.5 242.05,53.5 ; BT64.2@264.05,58.5 264.05,53.5 ; 44.05,53.5 66.05,53.5 ; 66.05,53.5 88.05,53.5 ; 88.05,53.5 110.05,53.5 ; 110.05,53.5 132.05,53.5 ; 132.05,53.5 154.05,53.5 ; 154.05,53.5 176.05,53.5 ; 176.05,53.5 198.05,53.5 ; 198.05,53.5 220.05,53.5 ; 220.05,53.5 242.05,53.5 ; 242.05,53.5 264.05,53.5
H6: BT66.2 BT67.2 BT68.2 BT69.2 BT70.2 BT71.2 BT72.2 BT73.2 BT74.2 BT75.2 BT76.2 BT77.2 BT78.2 U17.4 | length 866.4
  Top Layer w0.178: v1(81.407,218.11) 87.122,218.11 95.504,209.728 104.75,209.728 105.203,209.275 U17.4@106.88,209.275
  Bottom Layer w0.254: 21.05,32.387 ccw(c21.937,32.387) 21.937,31.5 44.05,31.5 ; 21.05,32.388 BT66.2@21.05,36.5 ; BT67.2@44.05,36.5 44.05,31.5 ; BT68.2@66.05,36.5 66.05,31.5 ; v1(81.407,218.11) 31.304,218.11 26.06,212.866 26.06,165.298 27.096,164.262 286.106,164.262 296.951,153.416 296.951,96.204 298.069,95.087 298.069,40.208 294.361,36.5 BT78.2@287.05,36.5 287.05,32.515 cw(c286.035,32.515) 286.035,31.5 264.05,31.5 ; BT69.2@88.05,36.5 88.05,31.5 ; BT70.2@110.05,36.5 110.05,31.5 ; BT71.2@132.05,36.5 132.05,31.5 ; BT72.2@154.05,36.5 154.05,31.5 ; BT73.2@176.05,36.5 176.05,31.5 ; BT74.2@198.05,36.5 198.05,31.5 ; BT75.2@220.05,36.5 220.05,31.5 ; BT76.2@242.05,36.5 242.05,31.5 ; BT77.2@264.05,36.5 264.05,31.5 ; 44.05,31.5 66.05,31.5 ; 66.05,31.5 88.05,31.5 ; 88.05,31.5 110.05,31.5 ; 110.05,31.5 132.05,31.5 ; 132.05,31.5 154.05,31.5 ; 154.05,31.5 176.05,31.5 ; 176.05,31.5 198.05,31.5 ; 198.05,31.5 220.05,31.5 ; 220.05,31.5 242.05,31.5 ; 242.05,31.5 264.05,31.5
H7: BT79.2 BT80.2 BT81.2 BT82.2 BT83.2 BT84.2 BT85.2 BT86.2 BT87.2 BT88.2 BT89.2 BT90.2 BT91.2 U17.5 | length 887.3
  Top Layer w0.178: v1(83.439,217.246) 83.464,217.272 87.198,217.272 95.25,209.22 104.47,209.22 104.915,208.775 U17.5@106.88,208.775
  Bottom Layer w0.254: 21.05,10.387 ccw(c21.937,10.387) 21.937,9.5 44.05,9.5 ; 21.05,10.388 BT79.2@21.05,14.5 ; BT80.2@44.05,14.5 44.05,9.5 ; BT81.2@66.05,14.5 66.05,9.5 ; v1(83.439,217.246) 31.518,217.246 26.822,212.55 26.822,165.613 27.412,165.024 286.537,165.024 297.688,153.873 297.688,96.545 298.755,95.479 298.755,19.025 294.23,14.5 BT91.2@287.05,14.5 287.05,10.515 cw(c286.035,10.515) 286.035,9.5 264.05,9.5 ; BT82.2@88.05,14.5 88.05,9.5 ; BT83.2@110.05,14.5 110.05,9.5 ; BT84.2@132.05,14.5 132.05,9.5 ; BT85.2@154.05,14.5 154.05,9.5 ; BT86.2@176.05,14.5 176.05,9.5 ; BT87.2@198.05,14.5 198.05,9.5 ; BT88.2@220.05,14.5 220.05,9.5 ; BT89.2@242.05,14.5 242.05,9.5 ; BT90.2@264.05,14.5 264.05,9.5 ; 44.05,9.5 66.05,9.5 ; 66.05,9.5 88.05,9.5 ; 88.05,9.5 110.05,9.5 ; 110.05,9.5 132.05,9.5 ; 132.05,9.5 154.05,9.5 ; 154.05,9.5 176.05,9.5 ; 176.05,9.5 198.05,9.5 ; 198.05,9.5 220.05,9.5 ; 220.05,9.5 242.05,9.5 ; 242.05,9.5 264.05,9.5
K1: H6.1 U17.41 | length 53.2
  Top Layer w0.178: H6.1@73.387,198.577 74.219,198.577 83.261,189.535 114.732,189.535 116.105,190.908 U17.41@116.105,197.05
K2: H6.2 U17.42 | length 53.3
  Top Layer w0.178: H6.2@73.387,196.037 75.794,196.037 82.894,188.937 114.871,188.937 116.605,190.671 U17.42@116.605,197.05
K3: H6.3 U17.43 | length 53.4
  Top Layer w0.178: H6.3@73.387,193.497 77.445,193.497 82.601,188.341 115.062,188.341 117.105,190.384 U17.43@117.105,197.05
K4: H6.4 U17.44 | length 53.5
  Top Layer w0.178: H6.4@73.387,190.957 79.019,190.957 82.245,187.731 115.214,187.731 117.605,190.122 U17.44@117.605,197.05
K5: H6.5 U17.45 | length 53.6
  Top Layer w0.178: H6.5@73.387,188.417 80.518,188.417 81.788,187.147 115.392,187.147 118.105,189.86 U17.45@118.105,197.05
K6: H6.6 U17.46 | length 54.2
  Top Layer w0.178: H6.6@73.387,185.877 81.102,185.877 81.763,186.538 115.545,186.538 118.605,189.598 U17.46@118.605,197.05
L1: Q1.1 R14.2 U1.15 | length 22.8
  Top Layer w0.254: Q1.1@19.3,155.5 R14.2@21.05,155.5 21.987,155.5 22.436,155.949 22.436,157.244 18.727,160.953 18.727,167.919 21.655,170.846 U1.15@21.655,172.699
L2: Q14.1 R40.2 U1.1 | length 38.4
  Top Layer w0.254: Q14.1@19.3,133.5 R40.2@20.767,133.5 22.364,133.5 23.223,134.359 23.223,157.549 20.385,160.387 U1.1@20.385,167.299
L3: Q27.1 R66.2 U1.2 | length 61.1
  Top Layer w0.254: Q27.1@19.3,111.5 R66.2@20.869,111.5 20.895,111.473 23.172,111.473 24.036,112.337 24.036,157.879 21.655,160.26 U1.2@21.655,167.299
L4: Q40.1 R92.2 U1.3 | length 83.4
  Top Layer w0.254: Q40.1@19.3,89.3 R92.2@21.05,89.3 ; R92.2@21.326,89.3 23.63,89.3 24.849,90.518 24.849,158.235 22.925,160.159 U1.3@22.925,167.299
L5: Q53.1 R118.2 U1.4 | length 105.9
  Top Layer w0.254: Q53.1@19.3,67.5 R118.2@21.05,67.5 ; R118.2@21.275,67.5 24.538,67.5 25.636,68.598 25.636,158.641 24.195,160.083 U1.4@24.195,167.299
L6: Q66.1 R144.2 U1.5 | length 128.6
  Top Layer w0.254: Q66.1@19.3,45.5 R144.2@21.05,45.5 25.22,45.5 26.449,46.729 26.449,159.098 25.465,160.083 U1.5@25.465,167.299
L7: Q79.1 R170.2 U1.6 | length 151.2
  Top Layer w0.254: Q79.1@19.3,23.5 R170.2@21.05,23.5 ; R170.2@21.072,23.5 26.055,23.5 27.262,24.707 27.262,159.657 26.735,160.184 U1.6@26.735,167.299